# Altium PCB uz_frontpanel_main.PcbDoc
Units mm, origin at the board's own origin, x right, y up, seen from the top; angles counter-clockwise.
Board outline 156 x 150 mm, 8 copper layers (Top Layer, Int1 (Sign), Int2 (GND), Int3 (Sign), Int4 (Sign), Int5 (PWR), Int6 (Sign), Bottom Layer), stack 1.6 mm thick; 18 components, 56 nets, 218 pads, 0 vias.
Unrouted connection lines stored in the file: 168.
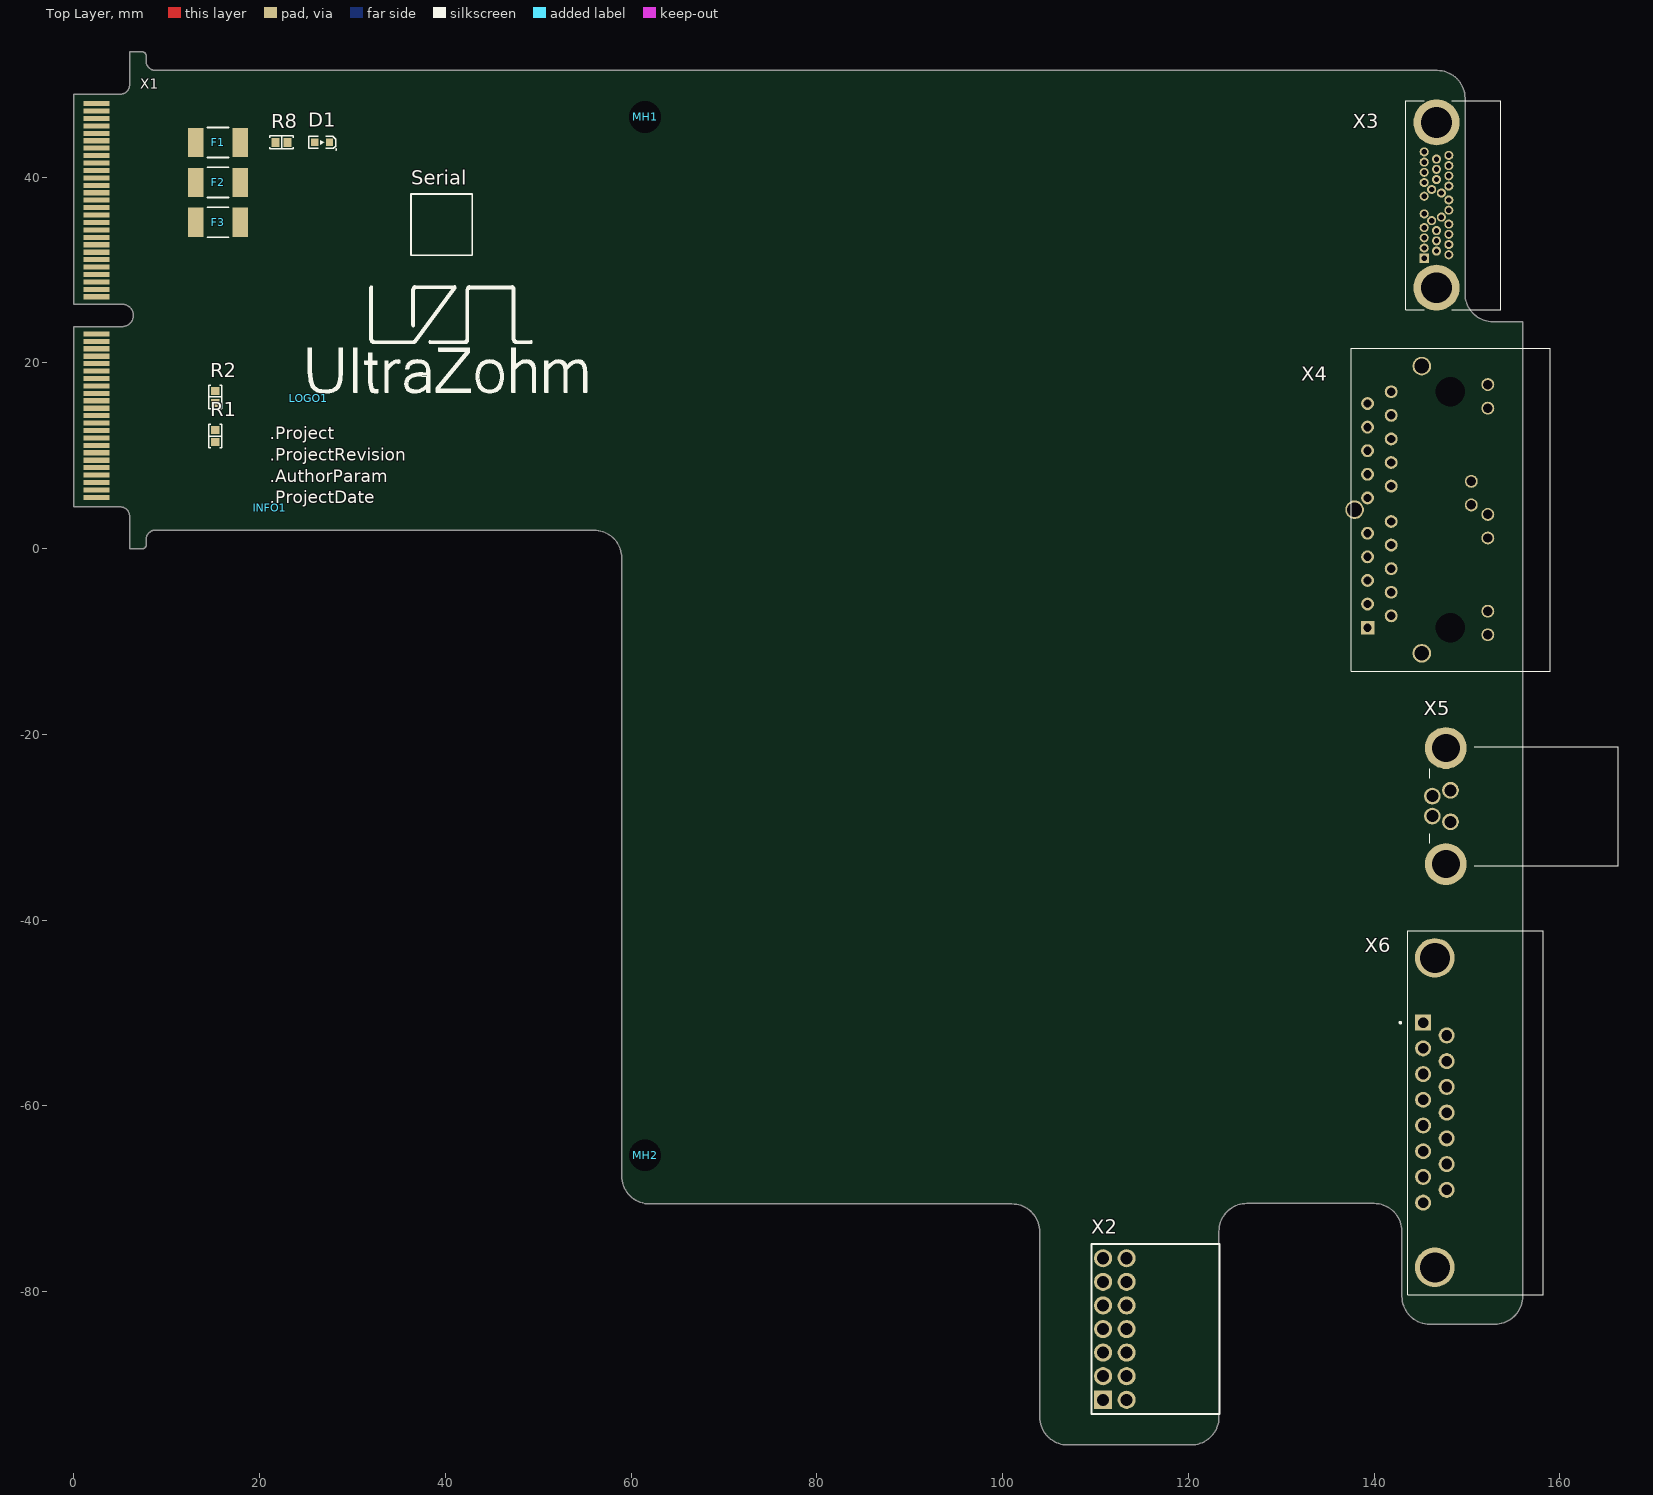
[diagram p0: Top Layer view]
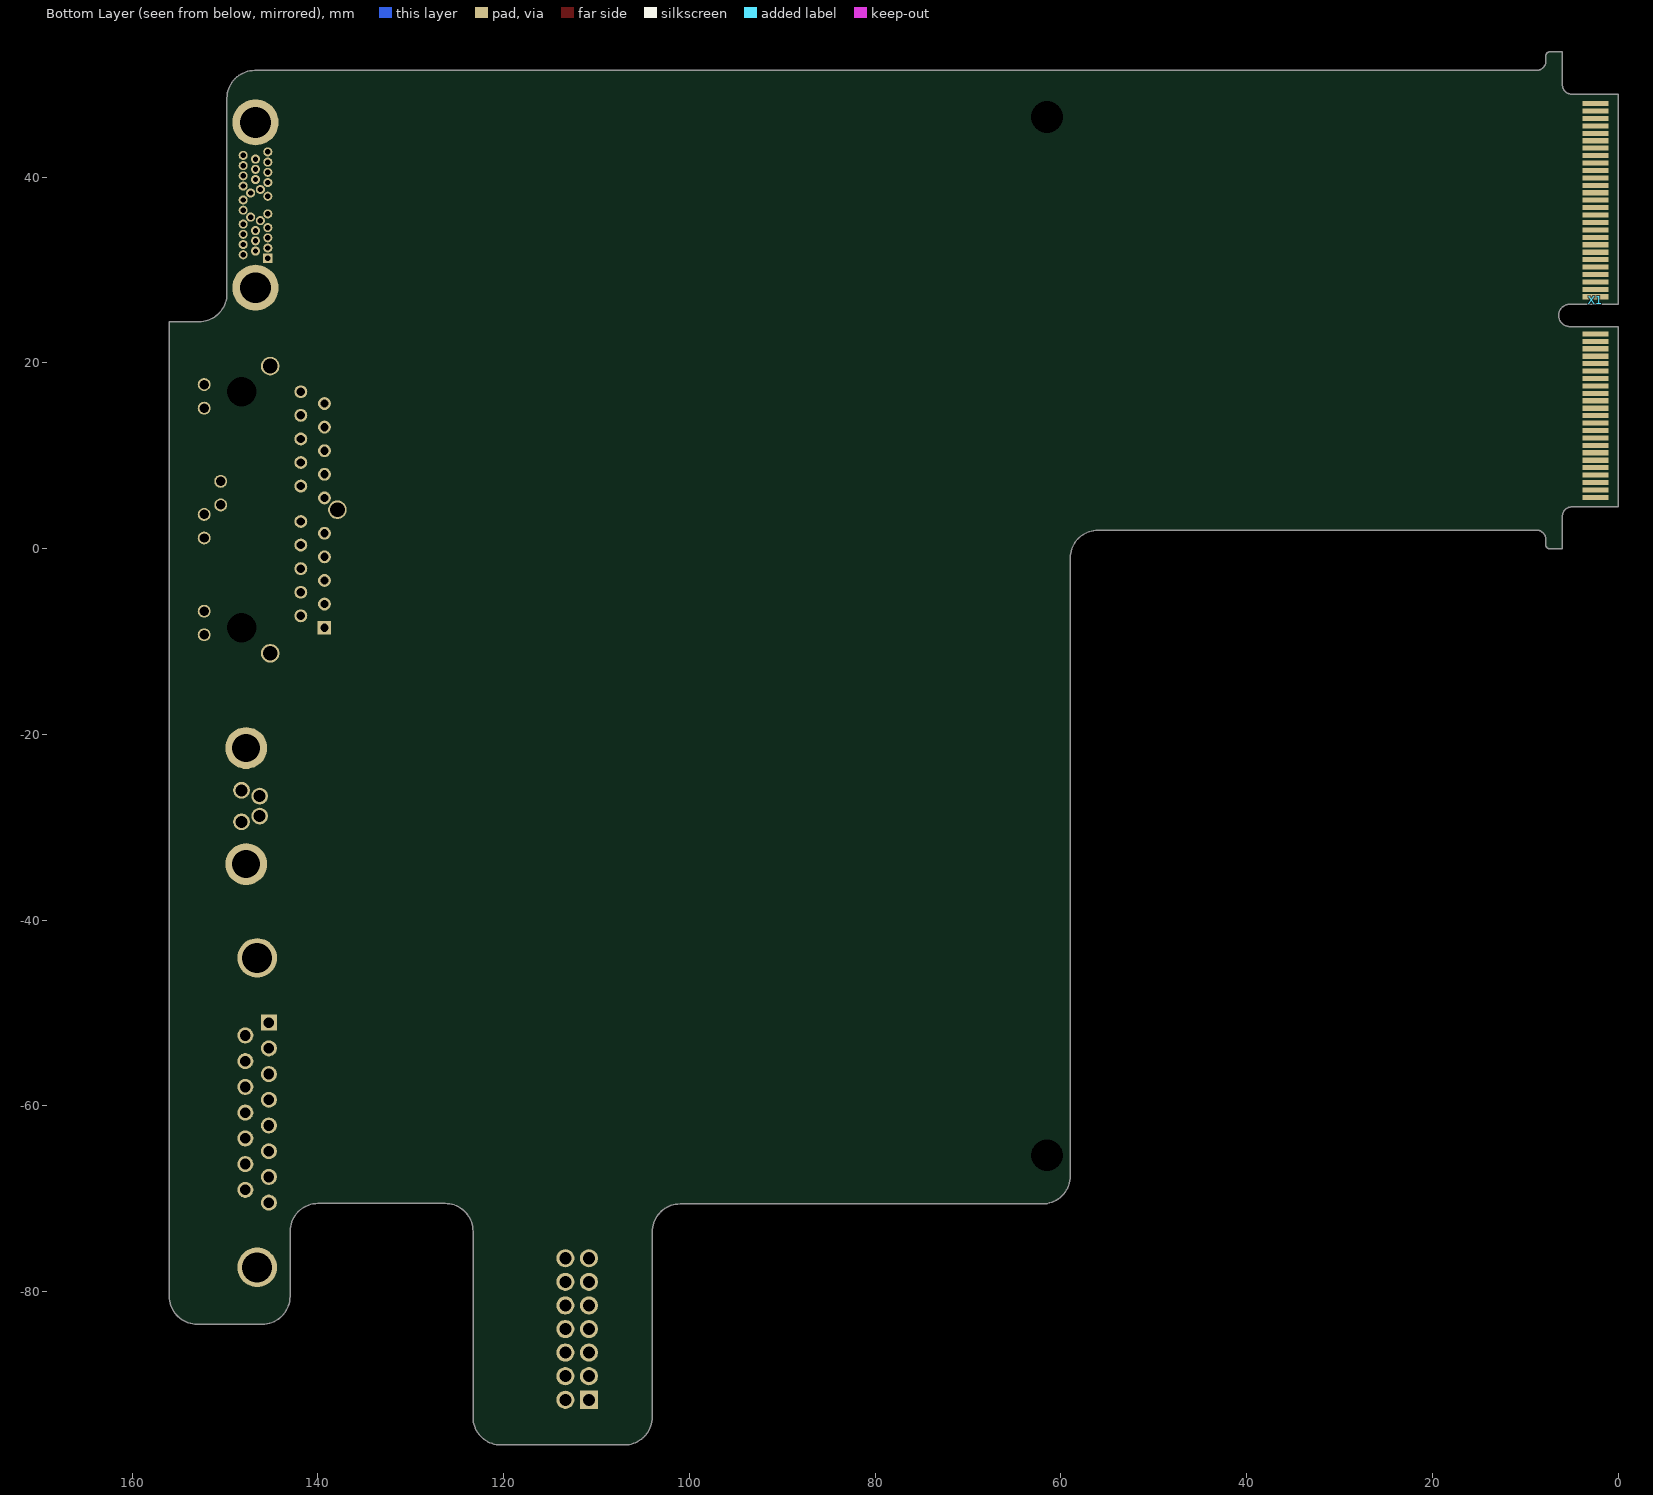
[diagram p1: Bottom Layer view, seen from below]
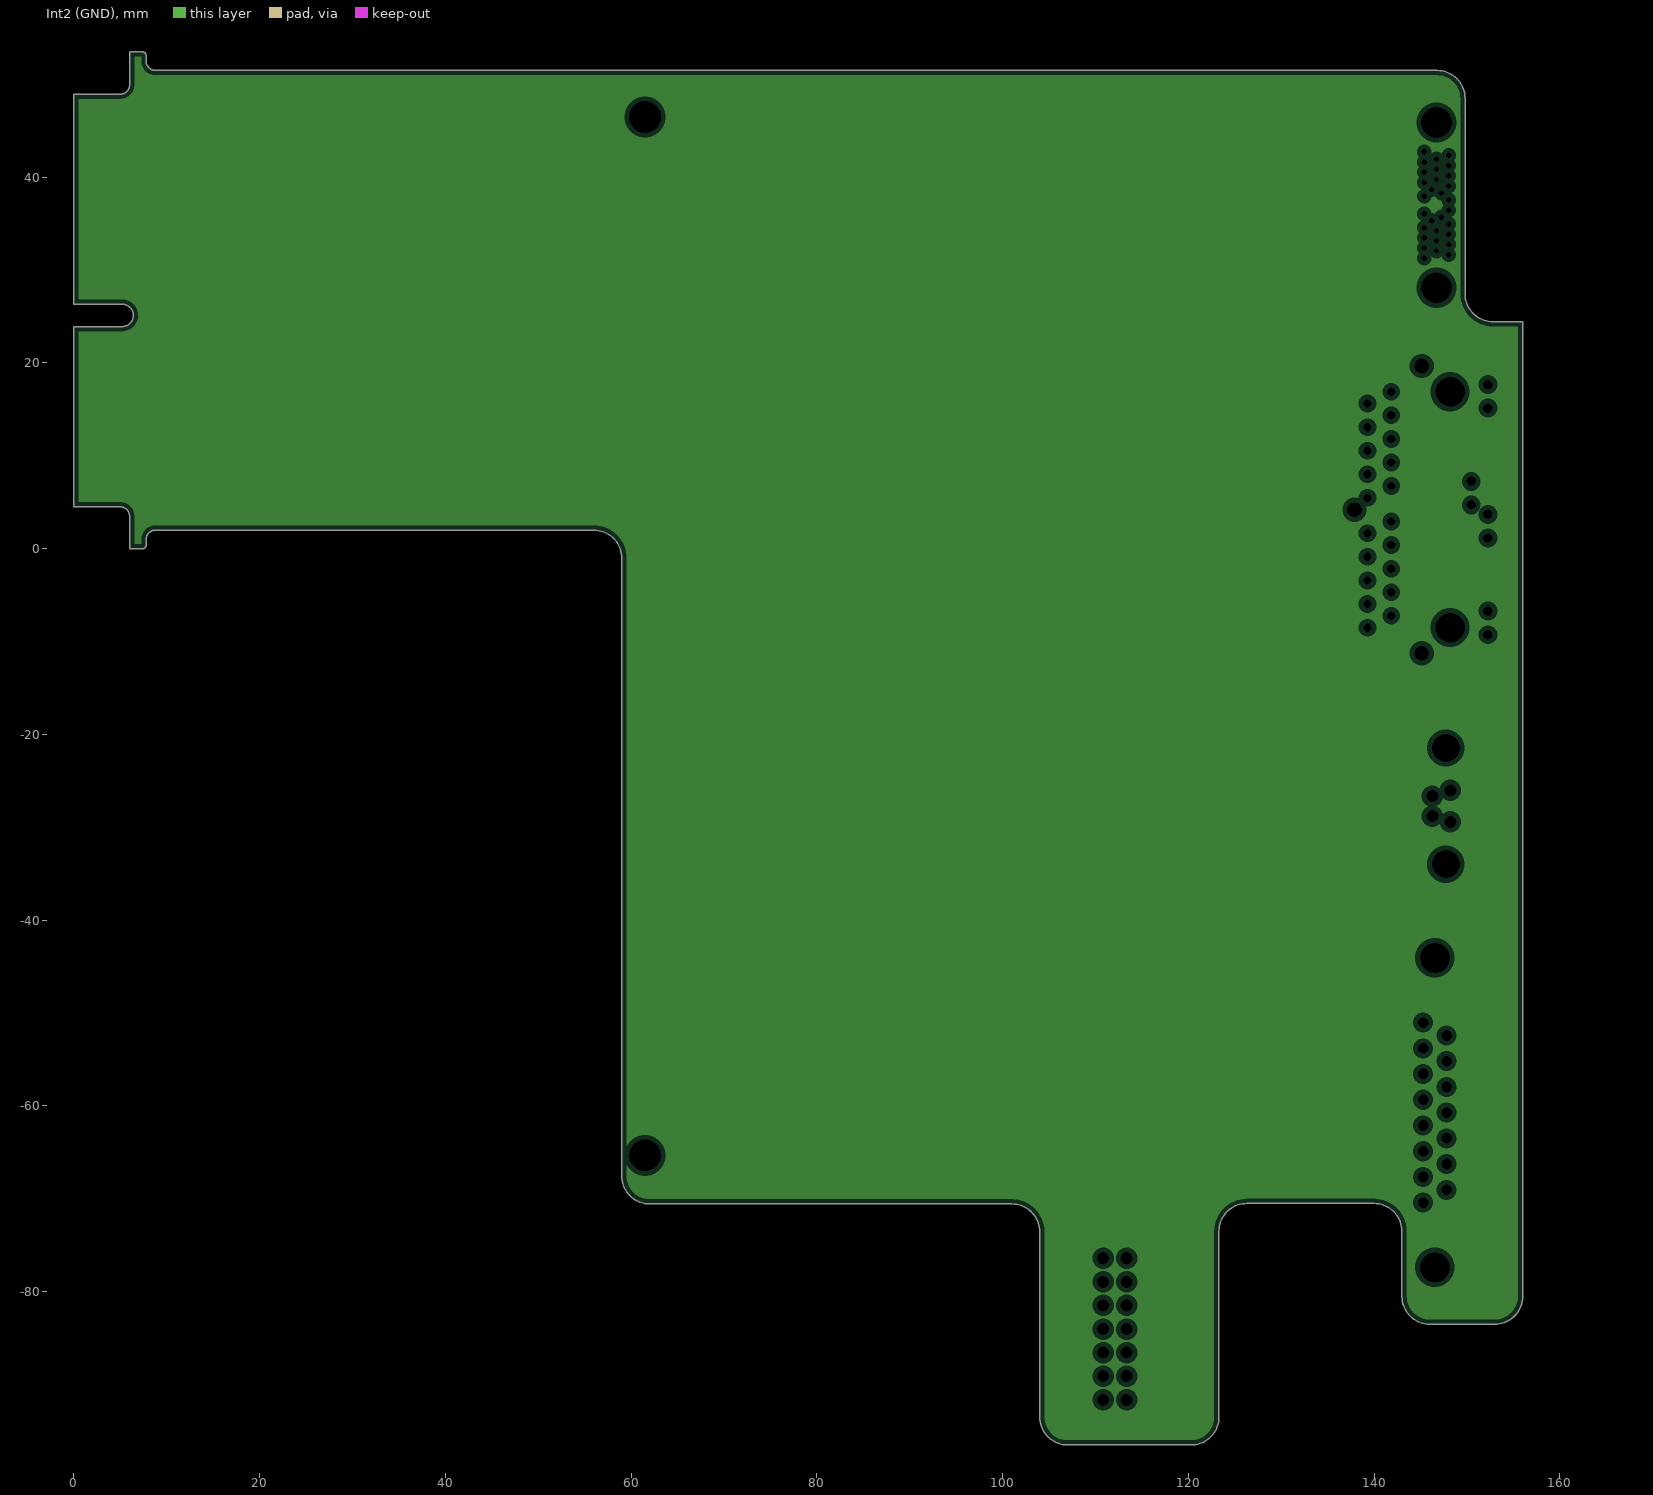
[diagram p2: Int2 (GND), clearances drawn from the general rule]
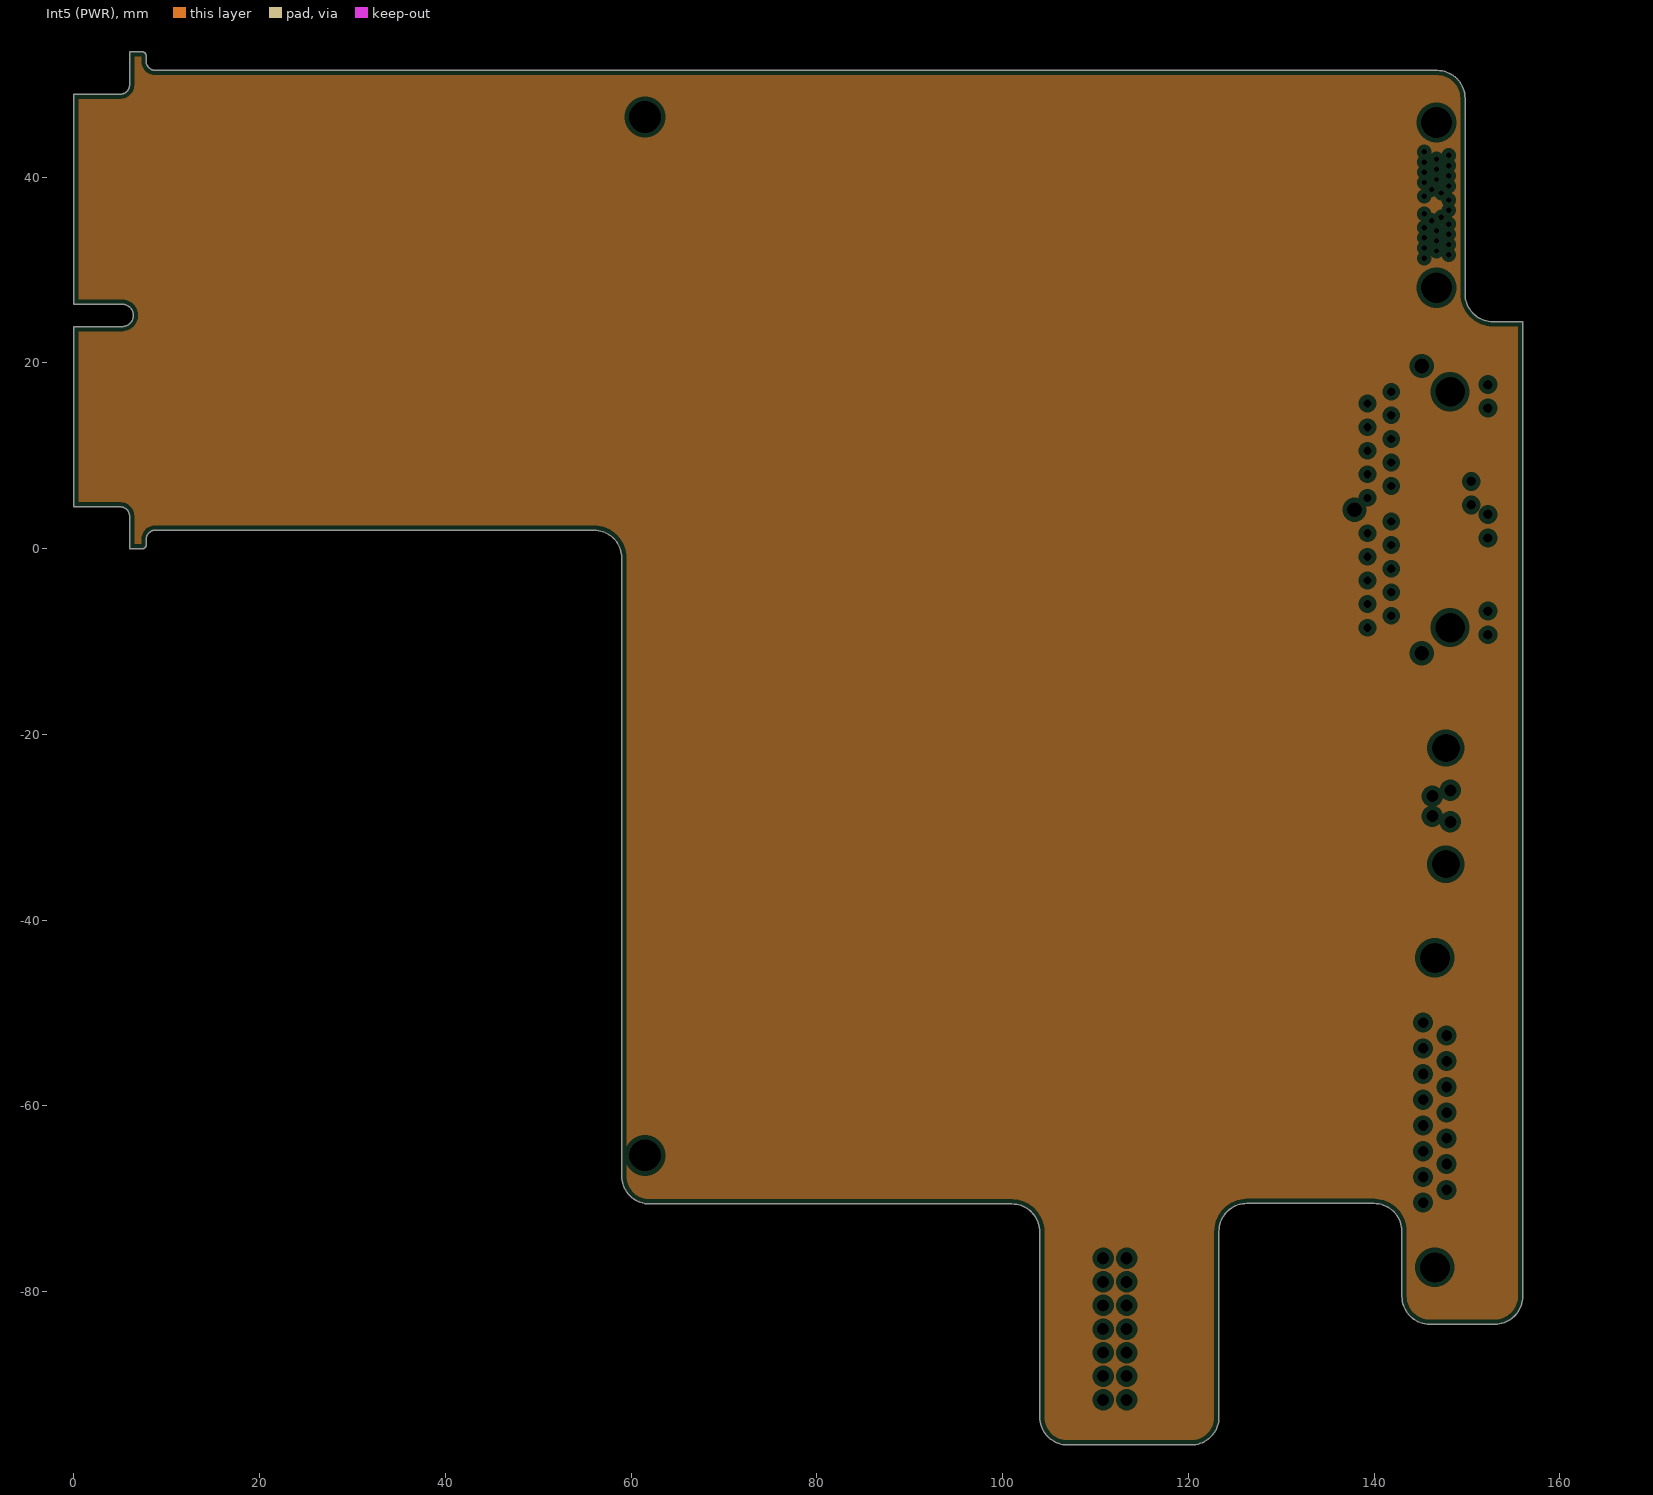
[diagram p3: Int5 (PWR), clearances drawn from the general rule]

## Layer stack, top to bottom
Top Solder: solder mask 0.0305, SM-001, Dk 3.8
Top Layer: signal copper 0.035
Dielectric 1: prepreg 0.1164, PP-016, Dk 4.16
Int1 (Sign): signal copper 0.0152
Dielectric 3: core 0.3, Core-027, Dk 4.6
Int2 (GND): plane copper 0.0152
Dielectric 4: prepreg 0.0764, PP-008, Dk 3.91
Dielectric 5: prepreg 0.0764, PP-008, Dk 3.91
Int3 (Sign): signal copper 0.0152
Dielectric 6: core 0.3, Core-027, Dk 4.6
Int4 (Sign): signal copper 0.0152
Dielectric 7: prepreg 0.0764, PP-008, Dk 3.91
Dielectric 8: prepreg 0.0764, PP-008, Dk 3.91
Int5 (PWR): plane copper 0.0152
Dielectric 9: core 0.3, Core-027, Dk 4.6
Int6 (Sign): signal copper 0.0152
Dielectric 11: prepreg 0.1164, PP-016, Dk 4.16
Bottom Layer: signal copper 0.035
Bottom Solder: solder mask 0.0305, SM-001, Dk 3.8

## Board outline
6,3.5 ccw(c5,3.5) 5,4.5 0,4.5 0,23.925 5.2,23.925 ccw(c5.2,25.125) 5.2,26.325 0,26.325 0,48.95 5,48.95 ccw(c5,49.95) 6,49.95 6,50 6,53.5 7.38,53.5 cw(c7.38,53.1) 7.78,53.1 7.78,52.5 ccw(c8.78,52.5) 8.78,51.5 146.8,51.5 cw(c146.8,48.5) 149.8,48.5 149.8,27.45 ccw(c152.8,27.45) 152.8,24.45 156,24.45 156,-80.5 cw(c153,-80.5) 153,-83.5 146,-83.5 cw(c146,-80.5) 143,-80.5 143,-73.5 ccw(c140,-73.5) 140,-70.5 126.3,-70.5 ccw(c126.3,-73.5) 123.3,-73.5 123.3,-93.5 cw(c120.3,-93.5) 120.3,-96.5 107,-96.5 cw(c107,-93.5) 104,-93.5 104,-73.55 ccw(c101,-73.55) 101,-70.55 62,-70.55 cw(c62,-67.55) 59,-67.55 59,-1 ccw(c56,-1) 56,2 8.78,2 ccw(c8.78,1) 7.78,1 7.78,0.4 cw(c7.38,0.4) 7.38,0 6,0

## Design rules (kind name [scope] priority, off if disabled: settings)
AssemblyTestPointUsage [InNetClass('3V3_SingleEnded') or InNetClass('5V_SingleEnded') or InNetClass('15V_SingleEnded') or InNetClass('DifferentialSignals')] p1:
BoardOutlineClearance [All] p1: gap=0.5 ignorepadtopadclearanceinfootprint=FALSE except(0: Arc-SplitContinuation Track-SplitContinuation SMDPad-SplitContinuation THPad-SplitContinuation Via-SplitContinuation Fill-SplitContinuation Poly-SplitContinuation Region-SplitContinuation Text-SplitContinuation)
Clearance Clearance_Differential [InNetClass('DifferentialSignals')] p1: gap=0.1 ignorepadtopadclearanceinfootprint=TRUE except(0: Arc-Hole Track-Hole SMDPad-Hole THPad-Hole Via-Hole Fill-Hole Poly-Hole Region-Hole Text-Hole; 0.3: SMDPad-Via; 0.4: THPad-Via)
Clearance Clearance_Power [InNetClass('Power')] p2: gap=0.1 ignorepadtopadclearanceinfootprint=TRUE except(0: Arc-Hole Track-Hole SMDPad-Hole THPad-Hole Via-Hole Fill-Hole Poly-Hole Region-Hole Text-Hole; 0.15: Via-Poly; 0.2: Track-Poly; 0.25: THPad-Poly; 0.3: Fill-Poly Poly-Region; 0.5: Poly-Poly)
Clearance [All] p3: gap=0.1 ignorepadtopadclearanceinfootprint=TRUE except(0: Arc-Hole Track-Hole SMDPad-Hole THPad-Hole Via-Hole Fill-Hole Poly-Hole Region-Hole Text-Hole; 0.4: SMDPad-Via THPad-Via; 0.5: Poly-Poly)
ComponentClearance [All] p1: gap=0.1 collisioncheckmode=3 verticalgap=0.1 showdistances=FALSE
DiffPairsRouting DiffPairsRouting_D100 [InNetClass('D100') OR InNetClass('MGT')] p1: maxlimit=0.167 minlimit=0.122 mostfreqgap=0.167 toplayer_mingap=0.122 toplayer_maxgap=0.122 toplayer_prefgap=0.122 toplayer_minwidth=0.1 toplayer_maxwidth=0.1 toplayer_prefwidth=0.1 midlayer1_mingap=0.167 midlayer1_minwidth=0.1 midlayer1_maxwidth=0.1 midlayer1_prefwidth=0.1 midlayer2_maxgap=0.122 midlayer2_prefgap=0.122 midlayer2_minwidth=0.1 midlayer2_maxwidth=0.1 midlayer2_prefwidth=0.1 midlayer3_maxgap=0.122 midlayer3_prefgap=0.122 midlayer3_minwidth=0.1 midlayer3_maxwidth=0.1 midlayer3_prefwidth=0.1 midlayer4_mingap=0.167 midlayer4_minwidth=0.1 midlayer4_maxwidth=0.1 midlayer4_prefwidth=0.1 bottomlayer_mingap=0.122 bottomlayer_maxgap=0.122 bottomlayer_prefgap=0.122 bottomlayer_minwidth=0.1 bottomlayer_maxwidth=0.1 bottomlayer_prefwidth=0.1 impedanceprofiledriven=TRUE impedanceprofileid={92C7DD9C-2956-4AB4-8EC1-0CC9A5262CD3} impedanceprofilevalue=100.000000 maxuncoupledlength=12.7
DiffPairsRouting DiffPairsRouting_USB [InNetClass('USB')] p2: maxlimit=0.102 minlimit=0.1 mostfreqgap=0.1 toplayer_maxgap=0.1 toplayer_minwidth=0.114 toplayer_maxwidth=0.114 toplayer_prefwidth=0.114 midlayer1_mingap=0.102 midlayer1_prefgap=0.102 midlayer1_minwidth=0.1 midlayer1_maxwidth=0.1 midlayer1_prefwidth=0.1 midlayer2_maxgap=0.1 midlayer2_minwidth=0.118 midlayer2_maxwidth=0.118 midlayer2_prefwidth=0.118 midlayer3_maxgap=0.1 midlayer3_minwidth=0.118 midlayer3_maxwidth=0.118 midlayer3_prefwidth=0.118 midlayer4_mingap=0.102 midlayer4_prefgap=0.102 midlayer4_minwidth=0.1 midlayer4_maxwidth=0.1 midlayer4_prefwidth=0.1 bottomlayer_maxgap=0.1 bottomlayer_minwidth=0.114 bottomlayer_maxwidth=0.114 bottomlayer_prefwidth=0.114 impedanceprofiledriven=TRUE impedanceprofileid={0D8B0DFD-34C5-4572-9476-DD2B079BA94C} impedanceprofilevalue=90.000000 maxuncoupledlength=12.7
DiffPairsRouting DiffPairsRouting_CatchAll [IsDifferentialPair] p3: maxlimit=5 minlimit=5 mostfreqgap=5 toplayer_minwidth=1 toplayer_maxwidth=1 toplayer_prefwidth=1 midlayer1_minwidth=1 midlayer1_maxwidth=1 midlayer1_prefwidth=1 midlayer2_minwidth=1 midlayer2_maxwidth=1 midlayer2_prefwidth=1 midlayer3_minwidth=1 midlayer3_maxwidth=1 midlayer3_prefwidth=1 midlayer4_minwidth=1 midlayer4_maxwidth=1 midlayer4_prefwidth=1 bottomlayer_minwidth=1 bottomlayer_maxwidth=1 bottomlayer_prefwidth=1 maxuncoupledlength=12.7 // ... with obviously-unrealistic values to alert the designer
FanoutControl Fanout_Power [InNetClass('Power') or InNet('ENABLE')] p1: bgadir=Out bgaviamode=Centered fanoutstyle=Auto fanoutdirection=None viagrid=0.025
FanoutControl Fanout_RS422 [InNetClass('DifferentialSignals')] p2: bgadir=Out bgaviamode=Closest fanoutstyle=Rows fanoutdirection=OutOnly viagrid=0.025
FanoutControl Fanout_BGA [IsBGA] p3 off: bgadir=Out bgaviamode=Centered fanoutstyle=Auto fanoutdirection=Alternating viagrid=0.025 // Fanout_BGA (Default Rule)
FanoutControl Fanout_LCC [IsLCC] p4 off: bgadir=Out bgaviamode=Centered fanoutstyle=Auto fanoutdirection=Alternating viagrid=0.025 // Fanout_LCC (Default Rule)
FanoutControl Fanout_SOIC [IsSOIC] p5 off: bgadir=Out bgaviamode=Centered fanoutstyle=Auto fanoutdirection=Alternating viagrid=0.025 // Fanout_SOIC (Default Rule)
FanoutControl Fanout_Small [(CompPinCount < 5)] p6 off: bgadir=Out bgaviamode=Centered fanoutstyle=Auto fanoutdirection=OutThenIn viagrid=0.025 // Fanout_Small (Default Rule)
FanoutControl Fanout_Default [All] p7: bgadir=NE bgaviamode=Closest fanoutstyle=Rows fanoutdirection=InOnly viagrid=0.025 // Fanout_Default (Default Rule)
Height [All] p1: minheight=0 maxheight=50 prefheight=12.7
HoleSize [All] p1: absolutevalues=TRUE maxlimit=4 minlimit=0.025 maxpercent=80.000 minpercent=20.000
PlaneClearance [All] p1: clearance=0.508
PlaneConnect [All] p1: planeconnectstyle=Relief reliefexpansion=0.508 reliefentries=4 reliefconductorwidth=0.254 reliefairgap=0.254
PolygonConnect PolygonConnect_Therm [HoleSize > 2.6] p1: connectstyle=Direct reliefconductorwidth=0.254 reliefentries=4 polygonreliefangle="90 Angle" airgapwidth=0.254
PolygonConnect PolygonConnect_via [InPadClass('pad') or IsVia] p2: connectstyle=Direct reliefconductorwidth=0.254 reliefentries=4 polygonreliefangle="90 Angle" airgapwidth=0.254
PolygonConnect [All] p3: connectstyle=Relief reliefconductorwidth=0.3 reliefentries=4 polygonreliefangle="90 Angle" airgapwidth=0.25
RoutingLayers RoutingLayers_3V3Signals [InNetClass('3V3_SingleEnded')] p1 off: top layer_v5=TRUE mid layer 1_v5=TRUE mid layer 2_v5=TRUE mid layer 3_v5=TRUE mid layer 4_v5=TRUE bottom layer_v5=TRUE
RoutingLayers RoutingLayers_SingleEnded [InNetClass('15V_SingleEnded') or InNetClass('3V3_SingleEnded') or InNetClass('5V_SingleEnded')] p2 off: top layer_v5=TRUE mid layer 1_v5=TRUE mid layer 2_v5=TRUE mid layer 3_v5=TRUE mid layer 4_v5=TRUE bottom layer_v5=TRUE
RoutingLayers RoutingLayers_Differential [InNetClass('DifferentialSignals')] p3 off: top layer_v5=TRUE mid layer 1_v5=TRUE mid layer 2_v5=TRUE mid layer 3_v5=TRUE mid layer 4_v5=TRUE bottom layer_v5=FALSE
RoutingLayers [All] p4: top layer_v5=TRUE mid layer 1_v5=TRUE mid layer 2_v5=TRUE mid layer 3_v5=TRUE mid layer 4_v5=TRUE bottom layer_v5=TRUE
RoutingVias [All] p1: holewidth=0.3 width=0.5 viastyle="Through Hole" minholewidth=0.2 minwidth=0.4 maxholewidth=0.5 maxwidth=1
SolderMaskExpansion [All] p1: expansion=0.102 istentingtop=FALSE
SupplyNets "Schematic Supply Nets_6" [InNet('GND')] p1: voltage=0.000
SupplyNets "Schematic Supply Nets_5" [InNet('3V3_PER')] p2: voltage=0.000
SupplyNets "Schematic Supply Nets_4" [InNet('VIN_unfused')] p3: voltage=0.000
SupplyNets "Schematic Supply Nets_3" [InNet('3V3')] p4: voltage=0.000
SupplyNets "Schematic Supply Nets_2" [InNet('5V')] p5: voltage=0.000
SupplyNets "Schematic Supply Nets_1" [InNet('5V_PER')] p6: voltage=0.000
SupplyNets "Schematic Supply Nets" [InNet('VIN')] p7: voltage=0.000
UnRoutedNet UnRoutedNet_Signals [InNetClass('15V_SingleEnded') or InNetClass('3V3_SingleEnded') or InNetClass('5V_SingleEnded') or InNetClass('DifferentialSignals')] p1: checkbadconnections=TRUE
UnRoutedNet [All] p2: checkbadconnections=TRUE
Width Width_S50 [InNetClass('S50')] p1: maxlimit=0.184 minlimit=0.133 preferedwidth=0.172 toplayer_minwidth=0.184 toplayer_prefwidth=0.184 midlayer1_maxwidth=0.133 midlayer1_prefwidth=0.133 midlayer2_minwidth=0.172 midlayer2_maxwidth=0.172 midlayer3_minwidth=0.172 midlayer3_maxwidth=0.172 midlayer4_maxwidth=0.133 midlayer4_prefwidth=0.133 bottomlayer_minwidth=0.184 bottomlayer_prefwidth=0.184 impedanceprofiledriven=TRUE impedanceprofileid={DBC48055-3BDD-4D29-A398-A49D5C7E61E7} impedanceprofilevalue=50.000000 minimp=50.000000 maximp=50.000000 favimp=50.000000
Width Width_Power [InNetClass('Power')] p2: maxlimit=10 minlimit=0.2 preferedwidth=0.3 midlayer3_minwidth=0.254 midlayer3_maxwidth=0.254 midlayer3_prefwidth=0.254 midlayer4_minwidth=0.254 midlayer4_maxwidth=0.254 midlayer4_prefwidth=0.254 minimp=50.000000 maximp=50.000000 favimp=50.000000
Width [All] p3: maxlimit=10 minlimit=0.1 preferedwidth=0.3 midlayer1_prefwidth=0.15 midlayer2_prefwidth=0.15 midlayer3_prefwidth=0.1 midlayer4_prefwidth=0.1 minimp=50.000000 maximp=50.000000 favimp=50.000000
16 further rules are at their usual default settings.

## Classes and differential pairs
component class FrontPanelConnectors: X2 X3 X4 X5 X6
component class X1: D1 F1 F2 F3 MH1 MH2 R1 R2 R8 X1

## Components (designator, comment, footprint, x,y, rotation, side; value= is the part's Value field where it differs from the comment)
D1 "150060BS84000" WL-SMCW_0603 26.721,43.753 r180 top
F1 "Littelfuse_PTC_1812" 1812_PTC_Polyfuse_Littelfuse 15.521,43.753 r0 top value="PTC, 1.1 A, 24V"
F2 "Littelfuse_PTC_1812" 1812_PTC_Polyfuse_Littelfuse 15.521,39.453 r0 top value="PTC, 1.1 A, 24V"
F3 "Littelfuse_PTC_1812" 1812_PTC_Polyfuse_Littelfuse 15.521,35.153 r0 top value="PTC, 1.1 A, 24V"
INFO1 "Design Information" Design_info 21.1,4.4 r0 top
LOGO1 "UZ Logo" UZ_Logo_small 25.3,16.2 r0 top
MH1 "Mounting Hole" MH_3.4#1 109.26,39.8 r90 top
MH2 "Mounting Hole" MH_3.4#2 110.66,-4.2 r90 top
R1 "0R" "RES 0603_1608" 15.221,12.128 r90 top
R2 "0R" "RES 0603_1608" 15.221,16.344 r270 top
R8 "24k9" "RES 0603_1608" 22.371,43.753 r180 top
Serial "Serial #" SERIAL 38.3,37 r0 top
X1 "HSEC8-150-01-XX-DV-A-BL-CARD" HSEC8-150-01-XX-DV-A-BL-CARD 0.032,26.73 r270 bottom locked
X2 "SSW-107-22-F-D-RA" RHDRRA14W79P254_2X7_1829X851X495P 110.82,-91.64 r270 top locked
X3 "MUSBRM1C130" MUSBRM1C130 145.4,31.28 r90 top locked
X4 "TMJG26945AENL" TMJG26945AENL 137.9,4.205 r90 top locked
X5 "M8S-04PFFR-SF8001" M8S04PFFRSF8001 146.28,-26.635 r270 top locked
X6 "DS1037-15FNAKT74-0CC" "PCB - MISC - DSUB15" 146.55,-60.72 r90 top locked

## Footprints (in the part's own frame and the unit in brackets; to place one, negate y for a bottom-side part, rotate by r counter-clockwise, add the part's x,y. Pads: shape width x height; smd on the part's side, far side on the other; paste and mask are expansions set on the pad)
1812_PTC_Polyfuse_Littelfuse [mm] "Chip Fuse, 2-Leads, Body 4.6x3.24mm"
  rect 1.68x3.14 smd: 1(-2.39,0) 2(2.39,0)
  silkscreen extent -1.15,-1.62 1.15,1.62, body extent -2.3,-1.62 2.3,1.62, height 1.15
Design_info [mm] "Design information about the PCB"
HSEC8-150-01-XX-DV-A-BL-CARD [mm]
  rect 0.55x2.8 smd far side mask+0.05: 1(-21.2,-2.4) 3(-20.4,-2.4) 5(-19.6,-2.4) 7(-18.8,-2.4) 9(-18,-2.4) 11(-17.2,-2.4) 13(-16.4,-2.4) 15(-15.6,-2.4) 17(-14.8,-2.4) 19(-14,-2.4) 21(-13.2,-2.4) 23(-12.4,-2.4) 25(-11.6,-2.4) 27(-10.8,-2.4) 29(-10,-2.4) 31(-9.2,-2.4) 33(-8.4,-2.4) 35(-7.6,-2.4) 37(-6.8,-2.4) 39(-6,-2.4) 41(-5.2,-2.4) 43(-4.4,-2.4) 45(-3.6,-2.4) 47(-2.8,-2.4) 49(-2,-2.4) 51(-1.2,-2.4) 53(-0.4,-2.4) 55(3.6,-2.4) 57(4.4,-2.4) 59(5.2,-2.4) 61(6,-2.4) 63(6.8,-2.4) 65(7.6,-2.4) 67(8.4,-2.4) 69(9.2,-2.4) 71(10,-2.4) 73(10.8,-2.4) 75(11.6,-2.4) 77(12.4,-2.4) 79(13.2,-2.4) 81(14,-2.4) 83(14.8,-2.4) 85(15.6,-2.4) 87(16.4,-2.4) 89(17.2,-2.4) 91(18,-2.4) 93(18.8,-2.4) 95(19.6,-2.4) 97(20.4,-2.4) 99(21.2,-2.4)
  rect 0.55x2.8 smd mask+0.05: 2(-21.2,-2.4) 4(-20.4,-2.4) 6(-19.6,-2.4) 8(-18.8,-2.4) 10(-18,-2.4) 12(-17.2,-2.4) 14(-16.4,-2.4) 16(-15.6,-2.4) 18(-14.8,-2.4) 20(-14,-2.4) 22(-13.2,-2.4) 24(-12.4,-2.4) 26(-11.6,-2.4) 28(-10.8,-2.4) 30(-10,-2.4) 32(-9.2,-2.4) 34(-8.4,-2.4) 36(-7.6,-2.4) 38(-6.8,-2.4) 40(-6,-2.4) 42(-5.2,-2.4) 44(-4.4,-2.4) 46(-3.6,-2.4) 48(-2.8,-2.4) 50(-2,-2.4) 52(-1.2,-2.4) 54(-0.4,-2.4) 56(3.6,-2.4) 58(4.4,-2.4) 60(5.2,-2.4) 62(6,-2.4) 64(6.8,-2.4) 66(7.6,-2.4) 68(8.4,-2.4) 70(9.2,-2.4) 72(10,-2.4) 74(10.8,-2.4) 76(11.6,-2.4) 78(12.4,-2.4) 80(13.2,-2.4) 82(14,-2.4) 84(14.8,-2.4) 86(15.6,-2.4) 88(16.4,-2.4) 90(17.2,-2.4) 92(18,-2.4) 94(18.8,-2.4) 96(19.6,-2.4) 98(20.4,-2.4) 100(21.2,-2.4)
M8S04PFFRSF8001 [mm]
  round 1.8 hole 1.3: 1(0,0) 2(2.15,0) 3(-0.625,1.95) 4(2.775,1.95)
  round 4.5 hole 3: MH1(-5.175,1.45) MH2(7.325,1.45)
  silkscreen extent -5.33,-0.3 7.47,20, body extent -5.33,-0.43 7.47,19.72, height 12.69
MH_3.4#1 [mm]
  round 3.1 hole 3.4 unplated: 1(6.69,47.76)
MH_3.4#2 [mm]
  round 3.1 hole 3.4 unplated: 1(-61.12,49.16)
MUSBRM1C130 [mm]
  rect 0.98x0.98 hole 0.58: A1(0,0)
  round 0.98 hole 0.58: A2(1.1,0) A3(2.2,0) A4(3.3,0) A5(4.05,-0.8) A6(4.775,0) A7(6.675,0) A8(7.4,-0.8) A9(8.15,0) A10(9.25,0) A11(10.35,0) A12(11.45,0) B1(11.075,-2.65) B2(9.975,-2.65) B3(8.875,-2.65) B4(7.775,-2.65) B5(7.025,-1.85) B6(6.275,-2.65) B7(5.175,-2.65) B8(4.425,-1.85) B9(3.675,-2.65) B10(2.575,-2.65) B11(1.475,-2.65) B12(0.375,-2.65) G1(0.775,-1.325) G2(1.875,-1.325) G3(2.975,-1.325) G4(8.475,-1.325) G5(9.575,-1.325) G6(10.675,-1.325)
  round 4.957 hole 3.305: SG1(-3.175,-1.325) SG2(14.625,-1.325)
  silkscreen extent -5.53,-8.25 16.98,1.99, body extent -6.03,-12.95 17.47,2, height 7.76
"PCB - MISC - DSUB15" [mm]
  rect 1.725x1.725 / inner round 1.725 / far side rect 1.725x1.725 hole 1.15: 1(9.695,1.27)
  round 1.725 hole 1.15: 2(6.925,1.27) 3(4.155,1.27) 4(1.385,1.27) 5(-1.385,1.27) 6(-4.155,1.27) 7(-6.925,1.27) 8(-9.695,1.27) 9(8.31,-1.27) 10(5.54,-1.27) 11(2.77,-1.27) 12(0,-1.27) 13(-2.77,-1.27) 14(-5.54,-1.27) 15(-8.31,-1.27)
  round 4.266 hole 3.25: S1(-16.66,0) S2(16.66,0)
  silkscreen extent -19.6,-11.67 19.6,3.82, body extent -19.63,-15.45 19.57,2.95, height 12.5
"RES 0603_1608" [mm] "Chip Resistor, 2-Leads, Body 1.60x0.80mm, IPC Medium Density"
  rect 0.85x0.95 smd: 1(-0.65,0) 2(0.65,0)
  silkscreen extent -1.27,-0.7 1.27,0.7, body extent -0.8,-0.4 0.8,0.4, height 0.45
RHDRRA14W79P254_2X7_1829X851X495P [mm]
  rect 1.95x1.95 hole 1.3: 1(0,0)
  round 1.95 hole 1.3: 2(0,2.54) 3(-2.54,0) 4(-2.54,2.54) 5(-5.08,0) 6(-5.08,2.54) 7(-7.62,0) 8(-7.62,2.54) 9(-10.16,0) 10(-10.16,2.54) 11(-12.7,0) 12(-12.7,2.54) 13(-15.24,0) 14(-15.24,2.54)
  silkscreen extent -16.77,-1.23 1.53,12.57, body extent -16.77,-0.4 1.53,12.57, height 4.95
SERIAL [mm]
  silkscreen extent -2,-5.4 4.6,1.2
TMJG26945AENL [mm]
  rect 1.462x1.462 hole 0.89: L1(-12.7,-1.4)
  round 1.386 hole 0.89: L2(-11.43,-3.94) L3(-10.16,-1.4) L4(-8.89,-3.94) L5(-7.62,-1.4) L6(-6.35,-3.94) L7(-5.08,-1.4) L8(-3.81,-3.94) L9(-2.54,-1.4) L10(-1.27,-3.94) R2(2.54,-3.94) R3(1.27,-1.4) R3(3.81,-1.4) R4(5.08,-3.94) R5(6.35,-1.4) R6(7.62,-3.94) R7(8.89,-1.4) R8(10.16,-3.94) R9(11.43,-1.4) R10(12.7,-3.94)
  round 1.386 hole 1.02: L11(-13.47,-14.35) L12(-10.93,-14.35) L13(-3.05,-14.35) L14(-0.51,-14.35) R11(0.51,-12.57) R12(3.05,-12.57) R13(10.93,-14.35) R14(13.47,-14.35)
  round 1.65 hole 3.2 unplated: MH1(-12.7,-10.29) MH2(12.7,-10.29)
  round 2 hole 1.6: S1(-15.465,-7.24) S2(0,0) S3(15.465,-7.24)
  silkscreen extent -17.4,-21.07 17.4,0.38, body extent -17.2,-21.1 17.28,0.15, height 14.95
UZ_Logo_small [mm] "logo width 3cm"
  silkscreen extent -0.05,0.57 29.94,12.12
WL-SMCW_0603 [mm] "SMD Mono-color Chip LED, body 1.6x0.8mm"
  rect 0.8x0.8 smd: 1(-0.8,0) 2(0.8,0)
  silkscreen extent -1.59,-0.65 1.45,0.83, body extent -0.8,-0.4 0.8,0.4, height 0.7

## Part data
D1: "WL-SMCW SMD Mono-color Chip LED Waterclear Blue", Color=blue, Device Package=0603, Forward Current I_f="20 mA", Forward Voltage U_f="3.2 V", LCSC Part Number=C5197644, Manufacturer="Wuerth Elektronik", Nominal Power="78 mW", Operating Temperature="-40 - 85 °C", Supplier Part Number 1=710-150060BS84000, Component Type="LED Diode", ComponentLink1Description=Datasheet, ComponentLink1URL=https://www.mouser.de/datasheet/2/445/150060BS84000-1838909.pdf, Created from=MGremer, Created On="08.12.2020 10:19:38", Last Updated="21.02.2024 14:46:49", Light Intensity="560 mcd", Live Cycle Status=1, Manufacturer Part Number=150060BS84000, Mounting Type=SMD, PartID=1, Stock number="not stored", Supplier 1=Mouser, Supplier 2=Farnell, Supplier 3=Digi-Key, Supplier Part Number 2=3408611, Supplier Part Number 3=732-150060BS84000CT-ND, Type=Standard, Wavelength="470 nm"
F1 F2 F3: "POLYSWITCH RESETTABLE DEVICES", Device Package=1812, Hold Current=1.1A, LCSC Part Number=C70119, Manufacturer=Littelfuse, MPN=miniASMDC110F/24, Nominal current="1 A", Operating Temperature="-40 - 85 °C", Resistance="0.18 Ohm", Supplier Part Number 1=530-0ZCG0150BF2C, Trip Current=2.2A, Voltage=24V, Component Type=Littelfuse_PTC_1812, ComponentLink1Description=Datasheet, ComponentLink1URL=https://www.littelfuse.com/~/media/electronics/datasheets/resettable_ptcs/littelfuse_ptc_surface_mount_catalog_datasheet.pdf.pdf, Created=2019_02_10_AGeiger, Created from=MHlatky, Created On="07.05.2021 06:50:33", Last Updated="21.02.2024 14:54:52", Live Cycle Status=1, Manufacturer Part Number=Littelfuse_PTC_1812, MF=Littelfuse, Mounting Type=SMD, Package=1812, PartID=5, Supplier 1=Mouser, Type=Fuse
INFO1: Manufacturer=UltraZohm, Supplier Part Number 1=-, Component Type="Design Information", ComponentLink1Description=https://docs.ultrazohm.com/, ComponentLink1URL=homepage, Created from=MGremer, Created On="03.11.2021 09:04:23", Last Updated="03.11.2021 09:28:34", Live Cycle Status=1, Manufacturer Part Number="Design Information", PartID=12, Supplier 1=-, Type="Design Information"
LOGO1: library part 1, "Official Project Logo of the UltraZohm", Manufacturer="PCB Manufacturer", Manufacturer Part Number="UltraZohm Logo", Component Type=Logo, ComponentLink1Description=Homepage, ComponentLink1URL=https://ultrazohm.com, Created from="T. Wendt", Created On="19.02.2021 16:55:56", Last Updated="02.03.2021 14:31:24", Live Cycle Status=1, PartID=1, Type="Standard (No BOM)"
MH1 MH2: Device Package=-, Component Type="Mounting Hole", ComponentLink1Description=Datasheet, Created from=MHlatky, Created On="26.01.2021 09:19:51", Last Updated="21.03.2022 23:05:12", Live Cycle Status=1, Manufacturer="Mounting Hole", Manufacturer Part Number="Mounting Hole", PartID=16, Stock number="not stored", Supplier 1="Mounting Hole", Supplier Part Number 1="Mounting Hole", Type="Mounting Hole"
R1 R2: library part RC0603JR-070RL, "SMD resistor E24 series", Device Package=0603, LCSC Part Number=C21189, Manufacturer=YAGEO, Supplier Part Number 1=603-RC0603JR-070RL, Tolerance=5%, Component Type="SMD resistor", ComponentLink1Description=Datasheet, ComponentLink1URL=https://www.mouser.de/datasheet/2/447/PYu-RC_Group_51_RoHS_L_10-1664068.pdf, Created from=MGremer, Created On="14.12.2020 16:17:14", Last Updated="04.03.2021 09:09:42", Live Cycle Status=1, Manufacturer Part Number=RC0603JR-070RL, Mounting Type=SMD, PartID=1, Stock number="Labor SMD Container", Supplier 1=Mouser, Supplier 2=LCSC, Supplier Part Number 2=C21189, Type=Resistor
R8: library part CRCW060324K9FKEA, "SMD resistor 1%", Device Package=0603, Manufacturer=Vishay, Supplier Part Number 1=71-CRCW0603-24.9K-E3, Tolerance=1%, Component Type="SMD resistor", ComponentLink1Description=Datasheet, ComponentLink1URL=https://www.mouser.de/datasheet/2/427/dcrcwe3-1762152.pdf, Created from=MGremer, Created On="14.12.2020 16:17:14", Last Updated="02.03.2021 14:07:32", Live Cycle Status=1, Manufacturer Part Number=CRCW060324K9FKEA, Mounting Type=SMD, PartID=157, Stock number="not stored", Supplier 1=Mouser, Type=Resistor
Serial: library part 6, "Field to put in a serial number", Manufacturer="PCB Manufacturer", Manufacturer Part Number="Serial Number", Component Type="Serial Number", Created from="T. Wendt", Created On="02.03.2021 14:31:24", Last Updated="02.03.2021 14:31:24", Live Cycle Status=1, PartID=6, Type="Standard (No BOM)"
X1: "Mating Card Layout for HSEC8-150-01-XX-DV-A-BL", Manufacturer=SAMTEC, Created=2018_04_23_AGeiger
X2: "Headers & Wire Housings Tiger Buy Socket Strip with PCB Tails, .100\" Pitch", LCSC Part Number=C5761361, Manufacturer=SAMTEC, Operating Temperature="-55 °C to +125 °C", Supplier Part Number 1=200-SSW10722FDRA, ComponentLink1Description=Datasheet, ComponentLink1URL=https://www.mouser.de/datasheet/2/527/ssw_th-2854740.pdf, Created from=FRosner, Created On="03.07.2024 09:52:49", Last Updated="03.07.2024 09:55:45", Manufacturer Part Number=SSW-107-22-F-D-RA, Mounting Type=THT, PartID=32, Series=SSW, Supplier 1=Mouser, Supplier 2=LCSC, Supplier Part Number 2=C5761361
X3: "USB Connectors RUGGED TYPE C RIGHT ANGLE", LCSC Part Number=C3197829, Manufacturer=Amphenol, Operating Temperature="-40 °C to +105 °C", Supplier Part Number 1=523-MUSBRM1C130, ComponentLink1Description=Datasheet, ComponentLink1URL=https://www.mouser.de/datasheet/2/18/2/io_harsh_musb_type_c-3369676.pdf, Created from=FRosner, Created On="04.07.2024 09:07:50", Last Updated="06.07.2024 04:11:24", Manufacturer Part Number=MUSBRM1C130, Mounting Type=THT, PartID=34, Series=MUSBR, Supplier 1=Mouser, Supplier 2=LCSC, Supplier Part Number 2=C3197829
X4: "Modular Connectors / Ethernet Connectors CONN JACK 2PORT 1000 BASE-T", Manufacturer=Taoglas, Operating Temperature="-40 °C to +80 °C", Supplier Part Number 1=960-TMJG26945AENL, ComponentLink1Description=Datasheet, ComponentLink1URL=https://www.mouser.de/datasheet/2/398/TMJG26945AENL-3400317.pdf, Created from=AGeiger, Created On="06.07.2024 04:11:24", Last Updated="06.07.2024 04:11:24", Manufacturer Part Number=TMJG26945AENL, Mounting Type=THT, PartID=35, Series=Atmos, Supplier 1=Mouser
X5: "Circular Metric Connectors M8 PANEL R/A PCB 4P F CONN F PIN", LCSC Part Number=C18212193, Manufacturer=Amphenol, Operating Temperature="-40 – 105 °C", Supplier Part Number 1=523-M8S04PFFRSF8001, Component Type="Amphenol LTW", ComponentLink1Description=Datasheet, ComponentLink1URL=https://www.mouser.de/datasheet/2/18/Amphenol_01132017_M8S-04PFFR-SF8001-1156555.pdf, Created from=FRosner, Created On="14.06.2024 08:06:51", Last Updated="06.07.2024 03:58:54", Live Cycle Status=1, Manufacturer Part Number=M8S-04PFFR-SF8001, Mounting Type=THT, PartID=9, Series="Amphenol LTW", Stock number="not stored", Supplier 1=Mouser, Supplier 2=LCSC, Supplier Part Number 2=C18212193, Type=LTW
X6: "15 Female D-Sub Shrouded 2 3A -40℃~+85℃ Plugin D-Sub/DVI/HDMI Connectors ROHS", BOM_JLCPCB Part Class="Extended Part", BOM_Manufacturer=Nextron(台湾正凌), BOM_Manufacturer Part=SUB-DRBF-607A-002, Device Package=THT, LCSC Part Number=C77835, Manufacturer="CONNFLY Elec", Operating Temperature=-40℃+105℃, BOM_Supplier=LCSC, BOM_Supplier Part=C2846090, Component Type="DSUB 15 pole female", ComponentLink1Description=Datasheet, ComponentLink1URL=https://jlcpcb.com/partdetail/ConnflyElec-DS1037_15FNAKT740CC/C77835, Contributor=LCSC, Created from=FRosner, Created On="17.03.2023 15:40:49", Last Updated="04.05.2023 15:17:49", Live Cycle Status=1, Manufacturer Part Number=DS1037-15FNAKT74-0CC, Mounting Type=THT, PartID=10, spicePre=D, spiceSymbolName=SUB-DRBF-607A-002, Stock number="not stored", Supplier 1=LCSC, Supplier Part Number 1=C77835, Type="DSUB 15 pole"

## Nets (pads, with @x,y where several pads share a name; then routed paths per layer and width w, separated by ;. In a path a pad name is that pad's centre, name@x,y a point inside that pad or via, vN(x,y) a via of type N, cw(c..) or ccw(c..) an arc to the next point about the centre after c; other vN are vias at no path point)
3V3: F3.2
3V3_PER: F3.1 X1.13 X1.14
5V: F2.2
5V_PER: F2.1 X1.9 X1.10
ADDR_0: X1.79
ADDR_1: X1.95
ADDR_2: X1.80
Collective_FLT: X1.96
CPLD_DigIn_01: X1.83
CPLD_DigIn_02: X1.85
CPLD_DigOut_01: X1.84
CPLD_DigOut_02: X1.86
DIG_IO_00: X1.17
DIG_IO_01: X1.18
DIG_IO_02: X1.21
DIG_IO_03: X1.22
DIG_IO_04: X1.25
DIG_IO_05: X1.26
DIG_IO_06: X1.29
DIG_IO_07: X1.30
DIG_IO_08: X1.33
DIG_IO_09: X1.34
DIG_IO_10: X1.37
DIG_IO_11: X1.38
DIG_IO_12: X1.41
DIG_IO_13: X1.42
DIG_IO_14: X1.45
DIG_IO_15: X1.46
DIG_IO_16: X1.49
DIG_IO_17: X1.50
DIG_IO_18: X1.53
DIG_IO_19: X1.54
DIG_IO_20: X1.57
DIG_IO_21: X1.58
DIG_IO_22: X1.61
DIG_IO_23: X1.62
DIG_IO_24: X1.65
DIG_IO_25: X1.66
DIG_IO_26: X1.69
DIG_IO_27: X1.70
DIG_IO_28: X1.73
DIG_IO_29: X1.74
DIG_Res_00: X1.78
DIG_Res_03: X1.91
DIG_Res_04: X1.92
DIG_Res_05: X1.93
DIG_Res_06: X1.94
DIG_Res_08: X1.77
GND: D1.1 R1.1 X1.1 X1.2 X1.3 X1.4 X1.7 X1.8 X1.11 X1.12 X1.15 X1.16 X1.19 X1.20 X1.23 X1.24 X1.27 X1.28 X1.31 X1.32 X1.35 X1.36 X1.39 X1.40 X1.43 X1.44 X1.47 X1.48 X1.51 X1.52 X1.55 X1.56 X1.59 X1.60 X1.63 X1.64 X1.67 X1.68 X1.71 X1.72 X1.75 X1.76 X1.81 X1.82 X1.87 X1.88 X1.97 X1.98
I2C0_SCL: X1.89
I2C0_SDA: X1.90
NetD1_2: D1.2 R8.1
PILOT_IN: R2.1 X1.100
PILOT_OUT: R1.2 R2.2 X1.99
VIN: F1.2 R8.2
VIN_unfused: F1.1 X1.5 X1.6
pads on no net: MH1.1 MH2.1 X2.1 X2.2 X2.3 X2.4 X2.5 X2.6 X2.7 X2.8 X2.9 X2.10 X2.11 X2.12 X2.13 X2.14 X3.A1 X3.A2 X3.A3 X3.A4 X3.A5 X3.A6 X3.A7 X3.A8 X3.A9 X3.A10 X3.A11 X3.A12 X3.B1 X3.B2 X3.B3 X3.B4 X3.B5 X3.B6 X3.B7 X3.B8 X3.B9 X3.B10 X3.B11 X3.B12 X3.G1 X3.G2 X3.G3 X3.G4 X3.G5 X3.G6 X3.SG1 X3.SG2 X4.L1 X4.L2 X4.L3 X4.L4 X4.L5 X4.L6 X4.L7 X4.L8 X4.L9 X4.L10 X4.L11 X4.L12 X4.L13 X4.L14 X4.MH1 X4.MH2 X4.R2 X4.R3 X4.R4 X4.R5 X4.R6 X4.R7 X4.R8 X4.R9 X4.R10 X4.R11 X4.R12 X4.R13 X4.R14 X4.S1 X4.S2 X4.S3 X5.1 X5.2 X5.3 X5.4 X5.MH1 X5.MH2 X6.1 X6.2 X6.3 X6.4 X6.5 X6.6 X6.7 X6.8 X6.9 X6.10 X6.11 X6.12 X6.13 X6.14 X6.15 X6.S1 X6.S2

## Polygon pours and split planes (outlines as drawn)
no net on Int2 (GND) (split plane): 386 vertices, not listed, extent 0.51,-95.991 155.491,52.99
no net on Int5 (PWR) (split plane): 386 vertices, not listed, extent 0.51,-95.991 155.491,52.99

## Silkscreen, mask and mechanical layers (free items; w line width, h text height)
Mechanical 1:
  lines w0.1: 6,49.95 cw(c5,49.95) 5,48.95 0,48.95 0,26.325 5.2,26.325 cw(c5.2,25.125) 5.2,23.925 0,23.925 0,4.5 5,4.5 cw(c5,3.5) 6,3.5 6,0 7.38,0 ccw(c7.38,0.4) 7.78,0.4 7.78,1 cw(c8.78,1) 8.78,2 56,2 cw(c56,-1) 59,-1 59,-67.55 ccw(c62,-67.55) 62,-70.55 101,-70.55 cw(c101,-73.55) 104,-73.55 ; 6,50 6,53.5 7.38,53.5 cw(c7.38,53.1) 7.78,53.1 ; 7.78,53.1 7.78,52.5 ccw(c8.78,52.5) 8.78,51.5 146.8,51.5 cw(c146.8,48.5) 149.8,48.5 149.8,27.4 ; 104,-73.5 104,-93.5 ccw(c107,-93.5) 107,-96.5 120.3,-96.5 ccw(c120.3,-93.5) 123.3,-93.5 123.3,-73.5 cw(c126.3,-73.5) 126.3,-70.5 140,-70.5 cw(c140,-73.5) 143,-73.5 143,-80.5 ccw(c146,-80.5) 146,-83.5 153,-83.5 ccw(c153,-80.5) 156,-80.5 156,24.45 152.8,24.45 cw(c152.8,27.45) 149.8,27.45

## Text inside footprints (layer, text, board x,y; h text height)
Serial: Mechanical 5 "SerialNr" at 42.1,33.2 h0.7 r180
X6: Top Assembly "PCB EDGE" at 157.853,-40.559 h1.27 r90